# Altium PCB PCB1.PcbDoc
Units mm, origin at the board's own origin, x right, y up, seen from the top; angles counter-clockwise.
Board outline 40 x 40 mm, 2 copper layers (Top Layer, Bottom Layer); 24 components, 22 nets, 121 pads, 12 vias.
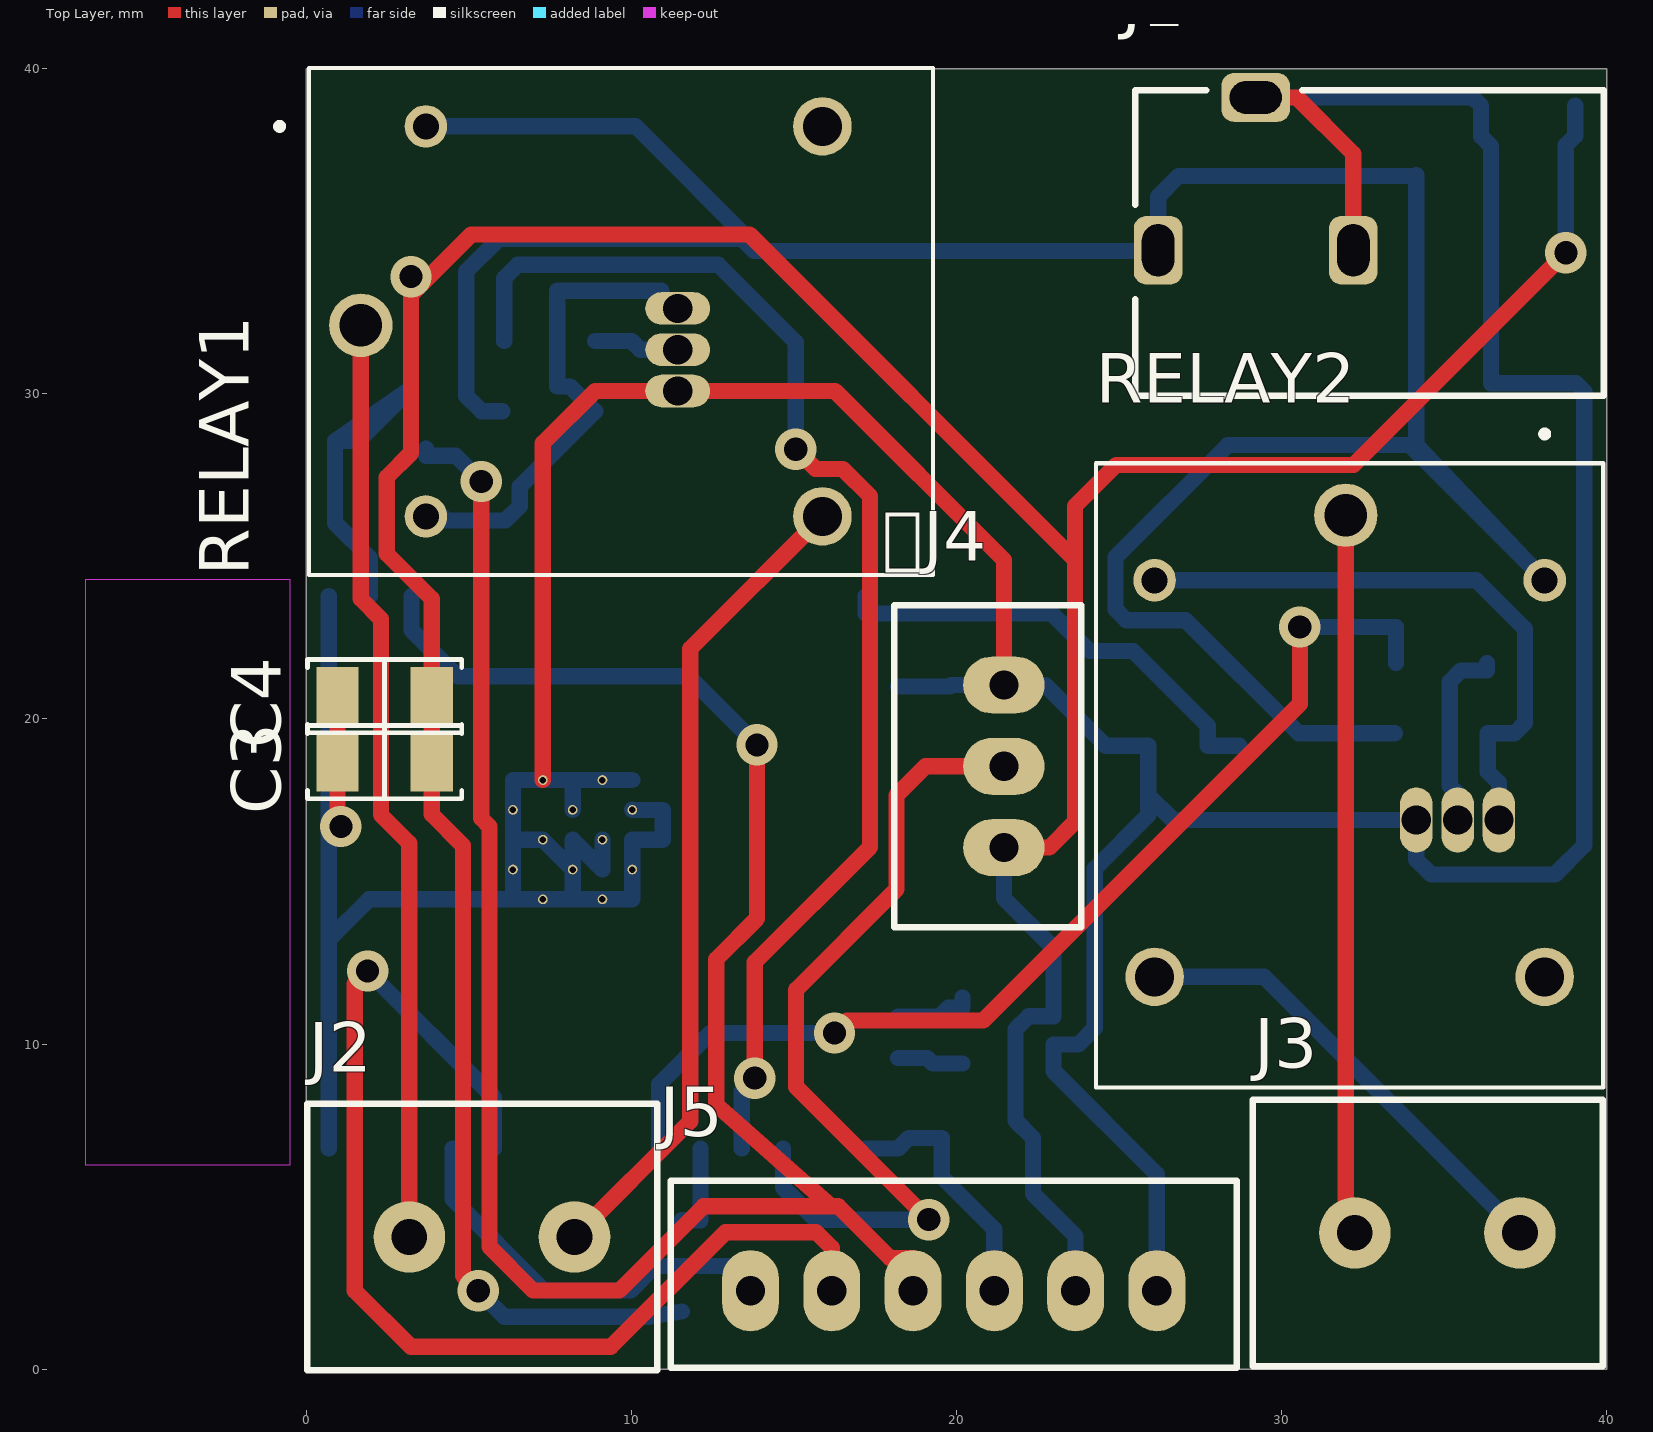
[diagram p0: Top Layer view]
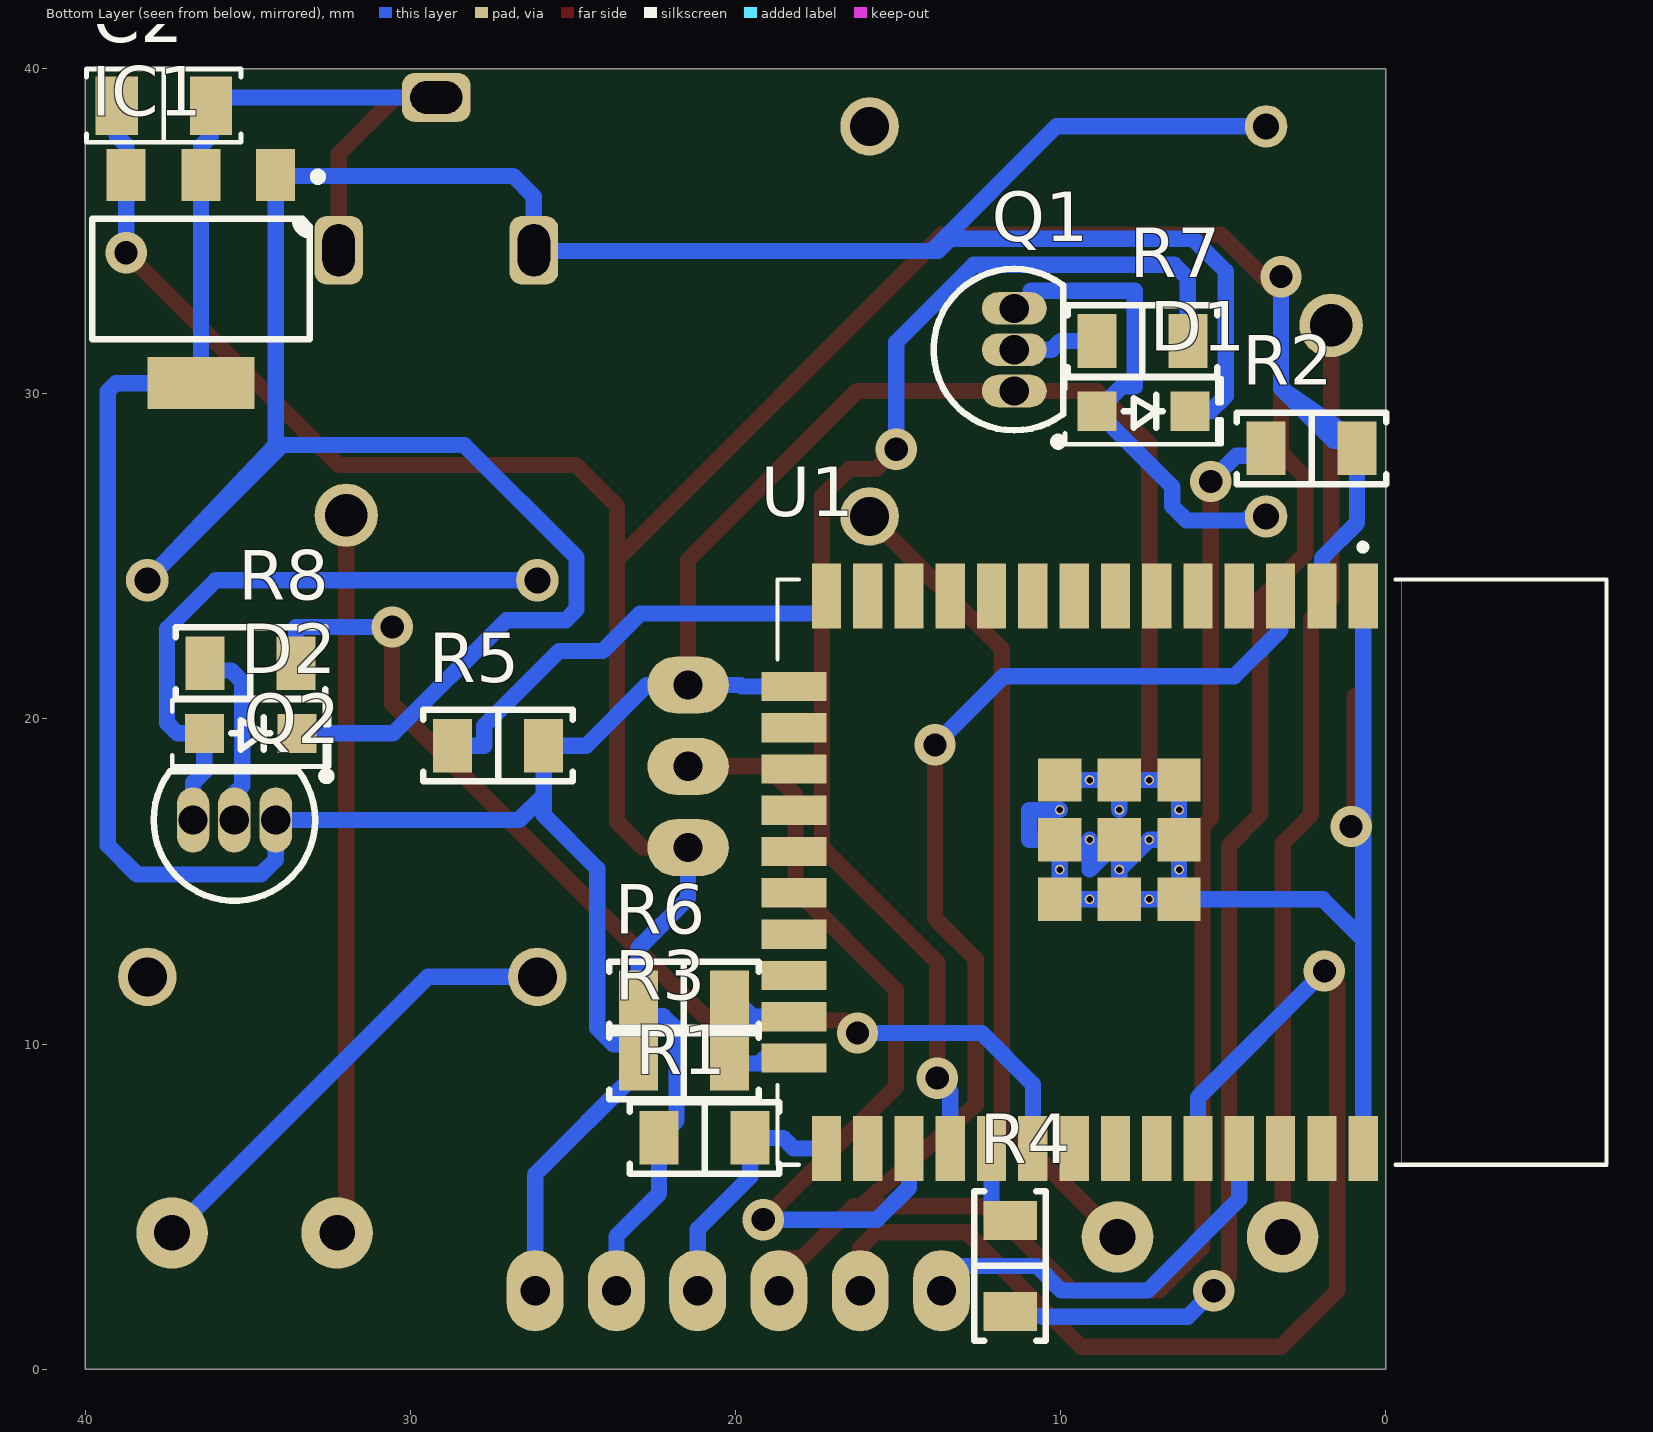
[diagram p1: Bottom Layer view, seen from below]
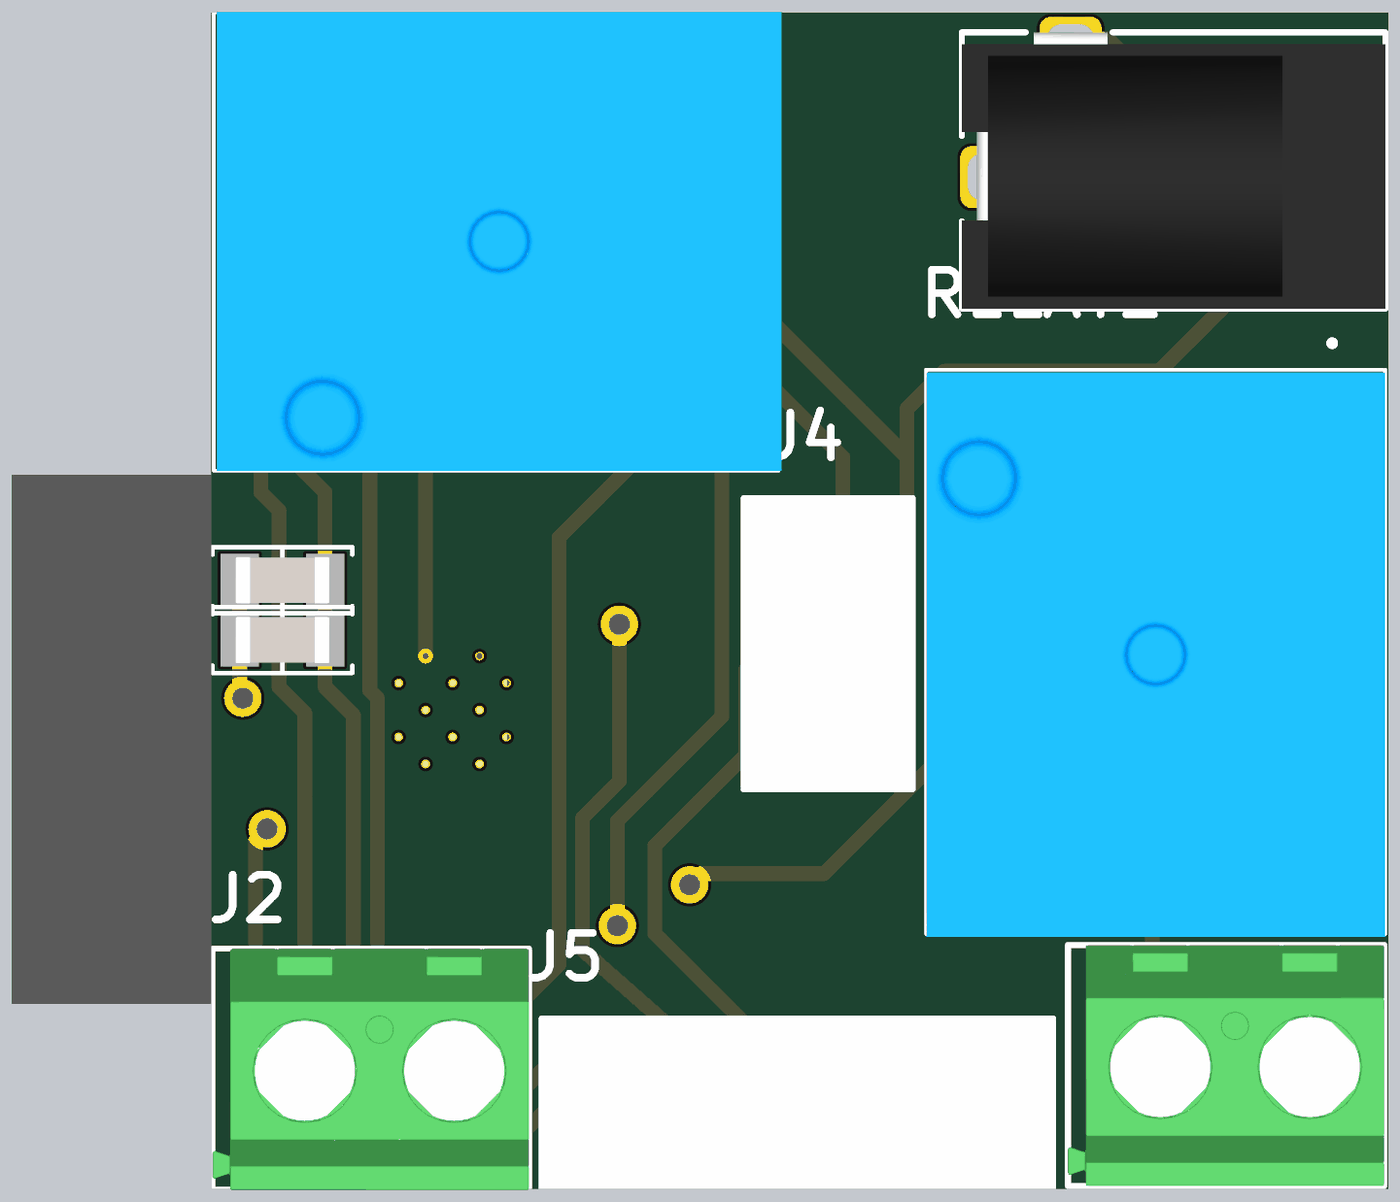
[diagram p2: 3D render of the assembled board from above, using the file's embedded part models]
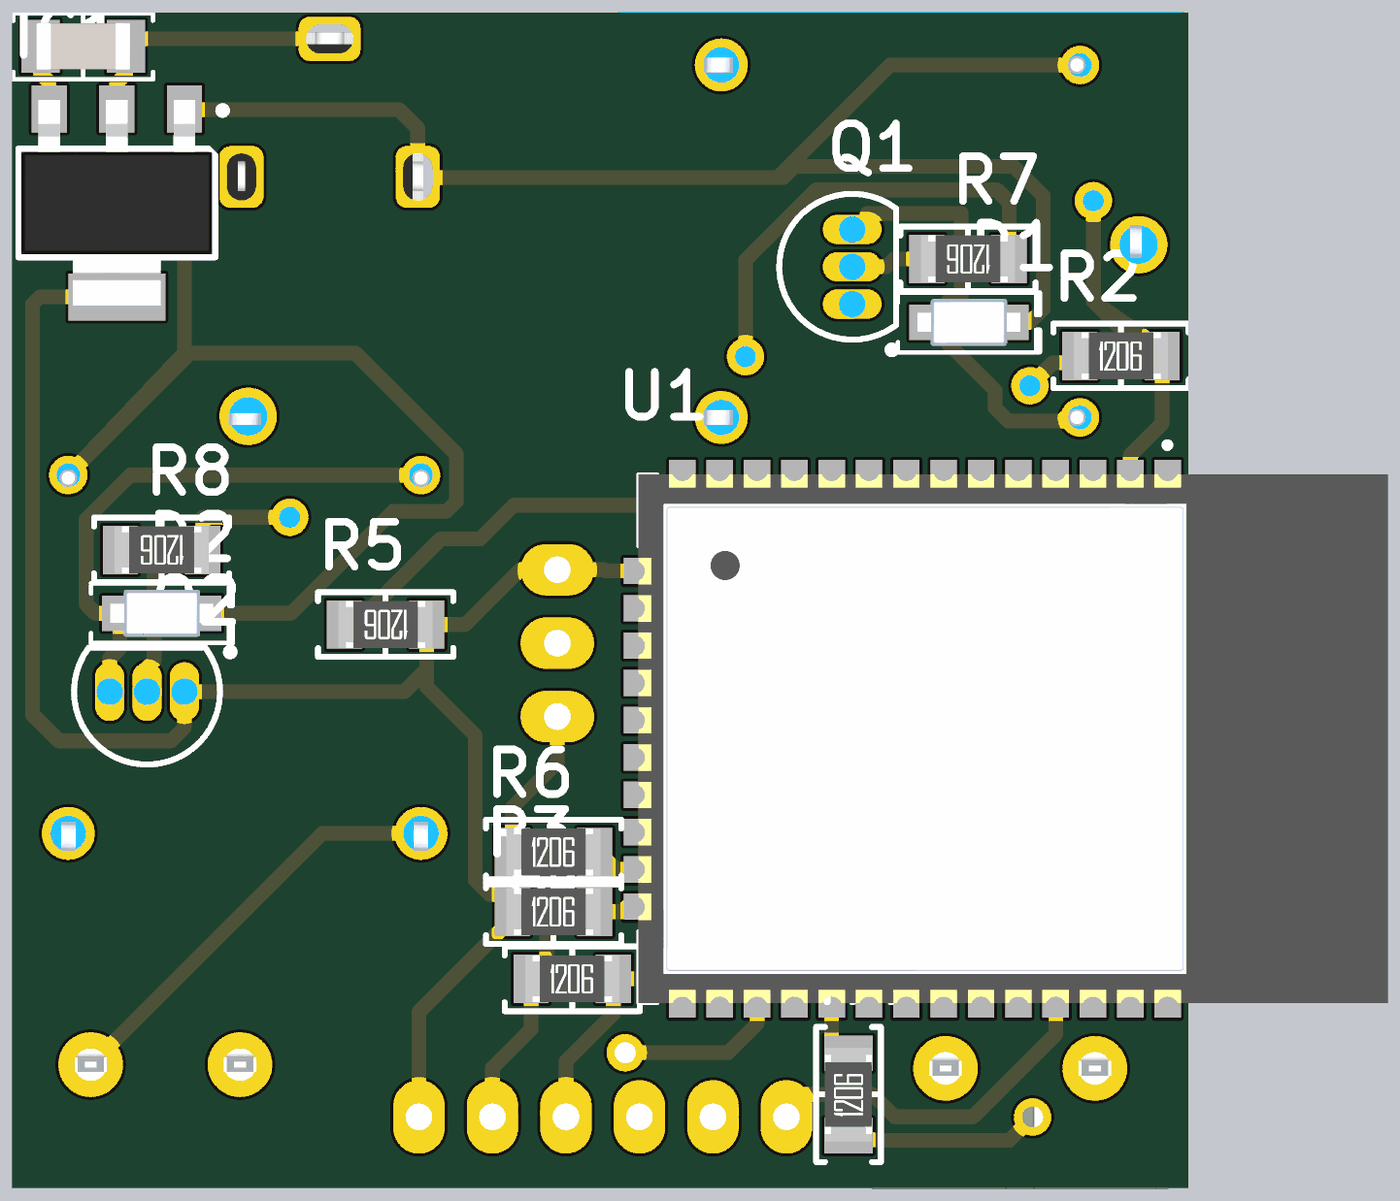
[diagram p3: 3D render of the assembled board from below, using the file's embedded part models]

## Layer stack, top to bottom
Top Solder: solder mask 0.0102, Solder Resist, Dk 3.5
Top Layer: signal copper 0.0356
Dielectric 1: dielectric 0.32, FR-4, Dk 4.8
Bottom Layer: signal copper 0.0356
Bottom Solder: solder mask 0.0102, Solder Resist, Dk 3.5

## Board outline
0,0 40.005,0 40.005,40.005 0,40.005

## Design rules (kind name [scope] priority, off if disabled: settings)
Clearance [All] p1: gap=0.3 ignorepadtopadclearanceinfootprint=TRUE
PolygonConnect [All] p1: connectstyle=Relief reliefconductorwidth=0.254 reliefentries=4 polygonreliefangle="90 Angle" airgapwidth=0.254
RoutingVias [All] p1: holewidth=0.711 width=1.27 viastyle="Through Hole" minholewidth=0.711 minwidth=1.27 maxholewidth=0.711 maxwidth=1.27
SolderMaskExpansion [All] p1: expansion=0.102 istentingtop=FALSE
Width [All] p1: maxlimit=1 minlimit=0.3 preferedwidth=0.5
30 further rules are at their usual default settings.

## Components (designator, comment, footprint, x,y, rotation, side; value= is the part's Value field where it differs from the comment)
J4 "B3B-XH-A(LF)(SN)" "JST XH B3B-XH-A" 21.463,18.542 r270 top
C2 "=VALUE" "CAP 1206_3216 - 0.8MM" 37.592,38.862 r0 bottom
C3 "=VALUE" "CAP 1206_3216 - 0.8MM" 2.413,18.669 r0 top
C4 "=VALUE" "CAP 1206_3216 - 0.8MM" 2.413,20.701 r0 top
D1 "1N4007FLTR" SOD123F 7.46,29.464 r180 bottom
D2 "1N4007FLTR" SOD123F 34.917,19.558 r180 bottom
IC1 "AP2114HA-3.3TRG1" "DIODES SOT-223" 36.449,33.528 r270 bottom
J1 "PJ-102AH" "CUI PJ-102AH" 32.71,34.416 r270 top
J2 "282837-2" "TE 282837-2" 5.715,4.064 r180 top
J3 "282837-2" "TE 282837-2" 34.798,4.191 r180 top
J5 "B6B-XH-A(LF)(SN)" "JST XH B6B-XH-A" 19.919,2.413 r180 top
Q1 "2N3904" TO-92A 11.43,31.357 r180 bottom
Q2 "2N3904" TO-92A 35.421,16.891 r90 bottom
R1 "10 kOhms" "RES 1206_3216" 20.955,7.112 r180 bottom
R2 "10 kOhms" "RES 1206_3216" 2.286,28.321 r180 bottom
R3 "10 kOhms" "RES 1206_3216" 21.59,9.398 r180 bottom
R4 "10 kOhms" "RES 1206_3216" 11.557,3.175 r90 bottom
R5 "10 kOhms" "RES 1206_3216" 27.305,19.177 r0 bottom
R6 "10 kOhms" "RES 1206_3216" 21.59,11.43 r180 bottom
R7 "1 kOhms" "RES 1206_3216" 7.493,31.623 r0 bottom
R8 "1 kOhms" "RES 1206_3216" 34.925,21.717 r0 bottom
RELAY1 "SRD-12VDC-SL-C" RELAY_SRD-12VDC-SL-C 9.783,32.227 r0 top
RELAY2 "SRD-12VDC-SL-C" RELAY_SRD-12VDC-SL-C 32.1,18.165 r270 top
U1 "ESP32-WROOM-32" MODULE_ESP32-WROOM-32 5.958,15.285 r270 bottom

## Footprints (in the part's own frame and the unit in brackets; to place one, negate y for a bottom-side part, rotate by r counter-clockwise, add the part's x,y. Pads: shape width x height; smd on the part's side, far side on the other; paste and mask are expansions set on the pad)
"CAP 1206_3216 - 0.8MM" [mm] "Chip Capacitor, 2-Leads, Body 3.25x1.60mm, IPC Medium Density"
  rect 1.3x1.8 smd: 1(-1.45,0) 2(1.45,0)
  silkscreen extent -2.38,-1.13 2.38,1.13, body extent -1.6,-0.8 1.6,0.8, height 0.8
"CUI PJ-102AH" [mm] "DC Barrel Jack W/ Switch 2.0x5.5"
  rrect50% 2.1x1.5 hole 1 slot 1.6 at 0 deg: 1(0,-6.5) 2(0,-0.5)
  rrect50% 1.5x2.1 hole 1 slot 1.6 at 90 deg: 3(-4.7,-3.5)
  silkscreen extent -4.93,-7.2 4.48,7.2, body extent -4.92,-7.2 4.47,7.2, height 11
"DIODES SOT-223" [mm] "SOT223, 4-Leads, Body 6.50x7.00mm (avg), Pitch 2.30mm, IPC Medium Density"
  rect 1.6x1.2 smd: 1(-3.2,2.3) 2(-3.2,0) 3(-3.2,-2.3)
  rect 1.6x3.3 smd: 4(3.2,0)
  silkscreen extent -3.27,-3.35 1.85,3.72, body extent -3.52,-3.25 3.5,3.25, height 1.8
"JST XH B3B-XH-A" [mm]
  oval 1.75x2.5 hole 0.9: 1(-2.5,0) 2(0,0) 3(2.5,0)
  silkscreen extent -4.95,-3.38 4.95,2.38, body extent -4.95,-3.37 4.95,2.38, height 7
"JST XH B6B-XH-A" [mm]
  oval 1.75x2.5 hole 0.9: 1(-6.25,0) 2(-3.75,0) 3(-1.25,0) 4(1.25,0) 5(3.75,0) 6(6.25,0)
  silkscreen extent -8.7,-3.38 8.7,2.38, body extent -8.7,-3.38 8.7,2.38, height 7
MODULE_ESP32-WROOM-32 [mm]
  rect 2x0.9 smd: 1(-8.5,5.26) 2(-8.5,3.99) 3(-8.5,2.72) 4(-8.5,1.45) 5(-8.5,0.18) 6(-8.5,-1.09) 7(-8.5,-2.36) 8(-8.5,-3.63) 9(-8.5,-4.9) 10(-8.5,-6.17) 11(-8.5,-7.44) 12(-8.5,-8.71) 13(-8.5,-9.98) 14(-8.5,-11.25) 25(8.5,-11.25) 26(8.5,-9.98) 27(8.5,-8.71) 28(8.5,-7.44) 29(8.5,-6.17) 30(8.5,-4.9) 31(8.5,-3.63) 32(8.5,-2.36) 33(8.5,-1.09) 34(8.5,0.18) 35(8.5,1.45) 36(8.5,2.72) 37(8.5,3.99) 38(8.5,5.26)
  rect 0.9x2 smd: 15(-5.715,-12.25) 16(-4.445,-12.25) 17(-3.175,-12.25) 18(-1.905,-12.25) 19(-0.635,-12.25) 20(0.635,-12.25) 21(1.905,-12.25) 22(3.175,-12.25) 23(4.445,-12.25) 24(5.715,-12.25)
  rect 1.33x1.33 smd: 39_1(-2.835,-0.405) 39_2(-1,-0.405) 39_3(0.835,-0.405) 39_4(-2.835,-2.24) 39_5(-1,-2.24) 39_6(0.835,-2.24) 39_7(-2.835,-4.075) 39_8(-1,-4.075) 39_9(0.835,-4.075)
  round 0.3 hole 0.2: 39_10(-1.917,-0.405) 39_11(-0.082,-0.405) 39_12(-2.835,-1.323) 39_13(-1,-1.323) 39_14(0.835,-1.323) 39_15(-1.917,-2.24) 39_16(-0.082,-2.24) 39_17(-2.835,-3.158) 39_18(-1,-3.158) 39_19(0.835,-3.158) 39_20(-1.917,-4.075) 39_21(-0.082,-4.075)
  Keep-Out Layer region: 9,6.45 -9,6.45 -9,12.75 9,12.75
  Keep-Out Layer region: 9,6.45 -9,6.45 -9,12.75 9,12.75
  silkscreen extent -10.1,-12.75 9,12.75, body extent -9,-12.75 9,12.75, height 3.2
RELAY_SRD-12VDC-SL-C [mm]
  round 1.308 hole 0.8: COIL1(-6.1,6) COIL2(-6.1,-6)
  round 1.95 hole 1.3: COM(-8.1,-0.12)
  round 1.8 hole 1.2: NC(6.1,6) NO(6.1,-6)
  silkscreen extent -10.7,-7.8 9.5,7.8, body extent -9.6,-7.8 9.6,7.8, height 15.8
"RES 1206_3216" [mm] "Chip Resistor, 2-Leads, Body 3.13x1.55mm, IPC Medium Density"
  rect 1.2x1.65 smd: 1(-1.4,0) 2(1.4,0)
  silkscreen extent -2.3,-1.1 2.3,1.1, body extent -1.6,-0.8 1.6,0.8, height 0.6
SOD123F [mm] "SODFL, 2-Leads, Body 1.60x3.50mm, IPC Medium Density"
  rect 1.2x1.2 smd: 1(-1.43,0) 2(1.43,0)
  silkscreen extent -2.41,-1.02 2.41,1.02, body extent -1.75,-0.8 1.75,0.8, height 1.1
"TE 282837-2" [mm] "Wire to Board Terminal Block Horizontal with Board, 2 Postions, Body 10.76x8.2 mm, Pitch 5.08mm"
  round 2.2 hole 1.1: 1(-2.54,0) 2(2.54,0)
  silkscreen extent -5.08,-4.1 5.68,4.1, body extent -5.08,-4.1 5.68,4.1, height 10.3
TO-92A [mm] "TO, Flat Index; 3 In-Line, Axial Leads; Body Dia. 4.5mm; Leads 0.51 x 0.48 mm (max)"
  oval 2x1 hole 0.9: 1(0,-1.27) 2(0,0) 3(0,1.27)
  silkscreen extent -2.48,-2.95 1.5,2.48, body extent -2.48,-2.5 1.5,2.5, height 6.86

## Part data
J4: "CONN HEADER VERT 3POS 2.5MM", Current Rating (Amps)=3A, Insulation Color=Natural, Manufacturer="JST Sales America Inc.", Material Flammability Rating="UL94 V-0", Operating Temperature="-25°C ~ 85°C", Supplier Part Number 1=455-2248-ND, Voltage Rating=250V, ComponentLink1Description=Datasheet, ComponentLink1URL=http://www.jst-mfg.com/product/pdf/eng/eXH.pdf, ComponentLink2Description="DigiKey Link", ComponentLink2URL=http://digikey.com/product-detail/en/jst-sales-america-inc/B3B-XH-A-LF-SN/455-2248-ND/1651046, Connector Type=Header, Contact Finish - Mating=Tin, Contact Finish - Post=Tin, Contact Length - Post="0.134\" (3.40mm)", Contact Material=Brass, Contact Shape=Square, Contact Type="Male Pin", Fastening Type="Detent Lock", Insulation Height="0.276\" (7.00mm)", Insulation Material="Polyamide (PA66), Nylon 6/6", LastUpdated="1/12/2020 11:46:22 PM", Lifecycle Status=Active, Minimum Order=1, Mounting Type="Through Hole", Number of Positions=3, Number of Positions Loaded=All, Number of Rows=1, Packaging=Bulk, Part Number=B3B-XH-A(LF)(SN), Part Status=Active, PartId=68, Pitch - Mating="0.098\" (2.50mm)", Price=0.19, Series=XH, Shrouding="Shrouded - 4 Wall", Style="Board to Cable/Wire", Supplier 1=DigiKey, Termination="Press-Fit, Solder"
C2 C3: library part EMK316BJ106MD-T, "CAP CER 10UF 16V X5R 1206", Capacitance="10 µF", Part Number=EMK316BJ106MD-T
C4: library part CC1206MRY5V9BB104, "CAP CER 0.1UF 50V Y5V 1206", Capacitance="0.1 µF", Part Number=CC1206MRY5V9BB104
D1 D2: "STANDARD RECTIFIER 1000V SOD-123", Capacitance @ Vr, F="15pF @ 4V, 1MHz", Current - Average Rectified (Io)=1A, Current - Reverse Leakage @ Vr="5µA @ 1000V", Manufacturer="SMC Diode Solutions", Package / Case=SOD-123F, Supplier Device Package=SOD-123FL, Supplier Part Number 1=1655-1N4007FLCT-ND, Voltage - DC Reverse (Vr) (Max)=1000V, Voltage - Forward (Vf) (Max) @ If="1.1V @ 1A", ComponentLink1Description=Datasheet, ComponentLink1URL=http://www.smc-diodes.com/propdf/1N4001FL-1N4007FL%20N1646%20REV.A.pdf, ComponentLink2Description="DigiKey Link", ComponentLink2URL=http://digikey.com/product-detail/en/smc-diode-solutions/1N4007FLTR/1655-1N4007FLCT-ND/11657827, Diode Type=Standard, LastUpdated="8/30/2020 8:59:55 PM", Lifecycle Status=Active, Minimum Order=1, Mounting Type="Surface Mount", Packaging=TapeAndReel, Part Number=1N4007FLTR, PartId=3314, Price=0.01, Speed="Standard Recovery >500ns, > 200mA (Io)", Supplier 1=DigiKey
IC1: "IC REG LINEAR 3.3V 1A SOT-223-3", Current - Output=1A, Current - Quiescent (Iq)="90 µA", Manufacturer="Diodes Incorporated", Operating Temperature="-40°C ~ 85°C", Package / Case="TO-261-4, TO-261AA", Supplier Device Package=SOT-223-3, Supplier Part Number 1=AP2114HA-3.3TRG1DICT-ND, Voltage - Input (Max)=6V, Voltage - Output (Min/Fixed)=3.3V, Voltage Dropout (Max)="0.75V @ 1A", ComponentLink1Description=Datasheet, ComponentLink1URL=https://www.diodes.com/assets/Datasheets/AP2114.pdf, ComponentLink2Description="DigiKey Link", ComponentLink2URL=https://www.digikey.com/en/products/detail/diodes-incorporated/AP2114HA-3-3TRG1/4770627, LastUpdated="4/5/2026 9:04:43 PM", Lifecycle Status=Active, Minimum Order=1, Mounting Type="Surface Mount", Number of Regulators=1, Output Configuration=Positive, Output Type=Fixed, Packaging=TapeAndReel, Part Number=AP2114HA-3.3TRG1, Part Status=Active, Price=0.08, Protection Features="Over Current, Over Temperature", PSRR="65dB (100Hz ~ 1kHz)", Series=-, Supplier 1=DigiKey
J1: "CONN PWR JACK 2X5.5MM SOLDER", Current Rating (Amps)=5A, Manufacturer="CUI Devices", Material Flammability Rating="UL94 V-0", Supplier Part Number 1=CP-102AH-ND, Voltage - Rated=24VDC, Actual Diameter="0.079\" (2.00mm ID), 0.256\" (6.50mm OD)", ComponentLink1Description=Datasheet, ComponentLink1URL=https://www.cuidevices.com/product/resource/digikeypdf/pj-102ah.pdf, ComponentLink2Description="DigiKey Link", ComponentLink2URL=//digikey.com/product-detail/en/cui-devices/PJ-102AH/CP-102AH-ND/408448, Connector Type=Jack, Gender=Male, Industry Recognized Mating Diameter="2.00mm ID (0.079\"), 5.50mm OD (0.217\")", Internal Switch(s)="Single Switch, Normally Closed", LastUpdated="12/16/2019 7:01:27 PM", Lifecycle Status=0, Mating Length/Depth="0.354\" (9.00mm)", Minimum Order=1, Mounting Type="Through Hole, Right Angle", Number of Positions/Contacts="2 Conductors, 3 Contacts", Packaging=Tray, Part Number=PJ-102AH, Part Status=Active, Price=0.76, Series=-, Shielding=Unshielded, Supplier 1=DigiKey, Termination=Solder
J2 J3: "TERM BLK 2P SIDE ENT 5.08MM PCB", Color=Green, Current="13.5 A", Manufacturer="TE Connectivity AMP Connectors", Supplier Part Number 1=A113320-ND, Voltage="300 V", ComponentLink1Description=Datasheet, ComponentLink1URL=https://www.te.com/commerce/DocumentDelivery/DDEController?Action=srchrtrv&DocNm=282837&DocType=Customer+Drawing&DocLang=English, ComponentLink2Description="DigiKey Link", ComponentLink2URL=https://www.digikey.com/en/products/detail/te-connectivity-amp-connectors/282837-2/2187973, Features="Interlocking (Side)", LastUpdated="6/21/2022 3:00:23 PM", Lifecycle Status=Active, Mating Orientation="Horizontal with Board", Minimum Order=1, Mounting Type="Through Hole", Number of Levels=1, Packaging=Tray, Part Number=282837-2, Part Status=Active, Pitch="0.200\" (5.08mm)", Positions Per Level=2, Price=0.31, Series=Buchanan, Supplier 1=DigiKey, Wire Gauge="16-28 AWG", Wire Termination="Screw - Rising Cage Clamp"
J5: "CONN HEADER VERT 6POS 2.5MM", Part Number=B6B-XH-A(LF)(SN)
Q1 Q2: "NPN General Purpose Amplifier", ComponentLink1Description="Manufacturer Link", ComponentLink1URL=http://www.fairchildsemi.com/, ComponentLink2Description=Datasheet, ComponentLink2URL=http://www.fairchildsemi.com/ds/2N%2F2N3904.pdf, DatasheetVersion=1997, LatestRevisionDate=15-Jan-2003, LatestRevisionNote="PCB Footprint 'BCY-W3/D4.7' replaced", PackageDescription="TO, Flat Index; 3 In-Line, Axial Leads; Body Dia. 4.5mm; Leads 0.51 x 0.48 mm (max)", PackageReference=TO-92A, PackageVersion=Sep-1998, Published=8-Jun-2000, Publisher="Altium Limited"
R1 R2 R3 R4 R5 R6 R7 R8: library part CRG1206F10K, "RES SMD 10K OHM 1% 1/4W 1206", Device Package="1206 (3216 Metric)", Manufacturer="TE Connectivity Passive Product", Operating Temperature="-55°C ~ 155°C", Power (Watts)="0.25W, 1/4W", Supplier Device Package=1206, Supplier Part Number 1=A106069CT-ND, Temperature Coefficient=±100ppm/°C, Tolerance=±1%, ComponentLink1Description=Datasheet, ComponentLink1URL=https://www.te.com/commerce/DocumentDelivery/DDEController?Action=srchrtrv&DocNm=1773204&DocType=DS&DocLang=English, ComponentLink2Description="DigiKey Link", ComponentLink2URL=https://www.digikey.com/en/products/detail/te-connectivity-passive-product/CRG1206F10K/2389909, Composition="Thick Film", Height - Seated (Max)="0.026\" (0.65mm)", LastUpdated="4/6/2026 8:00:52 PM", Lifecycle Status=Active, Minimum Order=1, Number of Terminations=2, Package / Case="1206 (3216 Metric)", Packaging=TapeAndReel, Part Number=CRG1206F10K, Part Status=Active, PartId=26989, Price=0.01, Series="CRG, Neohm", Size / Dimension="0.122\" L x 0.061\" W (3.10mm x 1.55mm)", Supplier 1=DigiKey
  R1 R2 R3 R4 R5 R6: Resistance="10 kOhms"
  R7 R8: Resistance="1 kOhms"
RELAY1 RELAY2: "General Purpose Non Latching 12VDC SPDT Through Hole Relays RoHS", Package="NON STANDARD-5 Songle Relay", Check_prices=https://www.snapeda.com/parts/SRD-12VDC-SL-C/Songle+Relay/view-part/?ref=eda, MF="Songle Relay", MP=SRD-12VDC-SL-C, SnapEDA_Link=https://www.snapeda.com/parts/SRD-12VDC-SL-C/Songle+Relay/view-part/?ref=snap
U1: "Bluetooth, WiFi 802.11b/g/n, Bluetooth v4.2 +EDR, Class 1, 2 and 3 Transceiver Module 2.4GHz ~ 2.5GHz Antenna Not Included, U.FL Surface Mount", Package="Module Espressif Systems", Availability="In Stock", Check_prices=https://www.snapeda.com/parts/ESP32-WROOM-32/Espressif+Systems/view-part/?ref=eda, MF="Espressif Systems", MP=ESP32-WROOM-32, Price=None, Purchase-URL=https://pricing.snapeda.com/search/part/ESP32-WROOM-32/?ref=eda, SnapEDA_Link=https://www.snapeda.com/parts/ESP32-WROOM-32/Espressif+Systems/view-part/?ref=snap

## Via types
v1: diameter 1.27, hole 0.711, Top Layer to Bottom Layer, 12 vias

## Nets (pads, with @x,y where several pads share a name; then routed paths per layer and width w, separated by ;. In a path a pad name is that pad's centre, name@x,y a point inside that pad or via, vN(x,y) a via of type N, cw(c..) or ccw(c..) an arc to the next point about the centre after c; other vN are vias at no path point)
+9: D1.2 D2.2 IC1.1 J1.1 RELAY1.COIL1 RELAY2.COIL1 | length 90.9
  Bottom Layer w0.5: RELAY1.COIL1 10.135,38.227 13.97,34.392 ; D1.2 5.397,29.464 4.928,29.934 4.928,33.769 5.931,34.772 13.399,34.772 13.78,34.392 13.97,34.392 ; D2.2 30.531,19.558 27.051,23.038 25.226,23.038 24.896,23.368 24.896,24.972 28.346,28.423 33.942,28.423 RELAY2.COIL1 34.149,28.423 IC1.1@34.149,36.703 ; IC1.1 IC1.1@34.149,36.703 ; 13.97,34.392 26.21,34.392 J1.1 26.21,36.068 26.845,36.703 IC1.1@34.149,36.703
GND: J4.1 C2.1 C3.1 C4.1 IC1.2 IC1.4 J1.2 J1.3 J5.1 Q1.1 Q2.1 R3.1 R5.1 U1.1 U1.15 U1.38 U1.39_1 U1.39_2 U1.39_3 U1.39_4 U1.39_5 U1.39_6 U1.39_7 U1.39_8 U1.39_9 U1.39_10 U1.39_11 U1.39_12 U1.39_13 U1.39_14 U1.39_15 U1.39_16 U1.39_17 U1.39_18 U1.39_19 U1.39_20 U1.39_21 | length 164.8
  Top Layer w0.5: C4.1 C3.1 0.963,16.792 v1(1.067,16.688) ; U1.39_12 7.281,28.477 8.89,30.087 Q1.1 16.268,30.087 21.463,24.892 J4.1 ; J1.3 30.48,39.116 32.21,37.386 J1.2
  Bottom Layer w0.5: U1.38 0.698,11.439 0.698,13.215 ; U1.1 v1@0.698,17.057 ; v1(1.067,16.688) v1@0.698,17.057 ; U1.39_15 U1.39_4 ; U1.39_18 9.116,15.367 U1.39_5 U1.39_16 ; U1.39_20 10.039,17.202 10.973,17.196 10.973,16.284 U1.39_8 U1.39_21 U1.39_9 9.598,14.45 U1.39_19 U1.39_6 ; U1.39_7 9.585,18.119 U1.39_17 U1.39_4 ; U1.15 19.812,21 19.855,21.042 J4.1 22.733,21.042 24.598,19.177 R5.1 25.905,17.653 ; J5.1 26.169,5.99 22.99,9.169 R3.1 22.99,9.982 23.749,9.982 24.257,10.49 24.257,15.395 25.905,17.043 25.905,17.653 ; J1.3 35.888,39.116 C2.1 36.142,37.924 36.449,37.617 IC1.4 36.713,30.328 39.065,30.328 39.319,30.074 39.319,16.116 38.417,15.215 34.608,15.215 34.151,15.671 Q2.1 26.667,16.891 25.905,17.653 ; 0.698,13.215 v1@0.698,17.057 ; 0.698,13.215 1.936,14.45 U1.39_3 ; U1.39_3 U1.39_11 U1.39_2 ; U1.39_3 U1.39_14 U1.39_6 ; U1.39_2 U1.39_10 U1.39_1 U1.39_12 U1.39_4 ; U1.39_2 U1.39_13 U1.39_16 ; U1.39_6 U1.39_16
GPIO0: J5.3 R1.2 U1.25 | length 7.9
  Bottom Layer w0.5: U1.25 18.212,6.784 18.539,7.112 R1.2 19.555,5.913 21.169,4.299 J5.3
GPIO2: R3.2 U1.24 | length 2.1
  Bottom Layer w0.5: U1.24 19.101,9.57 19.272,9.398 R3.2
GPIO5: R4.2 U1.29 | length 2.8
  Bottom Layer w0.5: R4.2 12.128,4.575 U1.29
GPIO12: R5.2 U1.14 | length 14.1
  Bottom Layer w0.5: U1.14 17.208,23.241 22.941,23.241 24.096,22.086 25.438,22.086 27.737,19.787 27.737,19.177 R5.2
GPIO15: R6.2 U1.23 | length 2.4
  Bottom Layer w0.5: U1.23 19.482,10.84 19.761,11.119 20.19,11.119 R6.2
NetD1_1: D1.1 Q1.3 RELAY1.COIL2 | length 15.8
  Bottom Layer w0.5: RELAY1.COIL2 4.197,26.227 4.197,26.105 6.129,26.105 6.567,26.543 6.567,27.141 D1.1 8.128,30.226 7.722,30.226 7.722,33.172 10.922,33.172 10.922,32.627 Q1.3
NetD2_1: D2.1 Q2.3 RELAY2.COIL2 | length 19
  Bottom Layer w0.5: RELAY2.COIL2 35.996,24.265 37.49,22.771 37.49,19.875 37.173,19.558 D2.1 36.347,18.378 36.691,18.034 Q2.3
NetQ1_2: Q1.2 R7.2 | length 2.6
  Bottom Layer w0.5: R7.2 10.008,31.623 10.274,31.357 Q1.2
NetQ2_2: Q2.2 R8.2 | length 5.9
  Bottom Layer w0.5: Q2.2 35.421,17.704 35.179,17.946 35.179,21.145 35.522,21.488 36.325,21.488 R8.2
RELAY1_COM: J2.2 RELAY1.COM | length 28.7
  Top Layer w0.5: RELAY1.COM 1.683,28.235 1.679,28.231 1.679,23.696 2.3,23.075 2.3,17.053 3.175,16.178 J2.2
RELAY1_NO: J2.1 RELAY1.NO | length 25.3
  Top Layer w0.5: J2.1 11.816,7.625 11.816,22.16 RELAY1.NO
RELAY1_OUT: R7.1 U1.28 | length 39.9
  Top Layer w0.5: v1(13.801,8.95) 13.801,12.512 17.348,16.059 17.348,26.848 16.51,27.686 15.672,27.686 v1(15.062,28.296)
  Bottom Layer w0.5: R7.1 6.093,33.553 6.512,33.972 12.675,33.972 15.062,31.585 v1(15.062,28.296) ; U1.28 13.398,8.547 v1(13.801,8.95)
RELAY2_COM: J3.2 RELAY2.COM | length 22.2
  Top Layer w0.5: RELAY2.COM 31.98,4.469 J3.2
RELAY2_NO: J3.1 RELAY2.NO | length 14.5
  Bottom Layer w0.5: RELAY2.NO 29.464,12.065 J3.1
RELAY2_OUT: R8.1 U1.30 | length 33
  Top Layer w0.5: v1(16.256,10.338) 16.641,10.723 20.832,10.723 30.571,20.462 30.571,22.823 v1(30.565,22.828)
  Bottom Layer w0.5: U1.30 10.858,8.763 12.433,10.338 v1(16.256,10.338) ; v1(30.565,22.828) 33.525,22.828 R8.1
RESET: J5.4 R2.1 U1.3 | length 71.7
  Top Layer w0.5: v1(5.385,27.305) 5.385,16.942 5.639,16.688 5.639,3.76 6.985,2.414 9.628,2.414 12.227,5.013 16.151,5.013 ; v1(13.868,19.202) 13.868,13.862 12.616,12.61 12.616,8.128 16.151,5.013 ; J5.4 18.669,3.413 17.968,3.413 16.368,5.013 16.151,5.013
  Bottom Layer w0.5: U1.3 3.238,22.733 4.66,21.311 11.76,21.311 v1(13.868,19.202) ; R2.1 3.686,28.092 4.597,28.092 v1(5.385,27.305)
RX: J5.5 U1.34 | length 35.4
  Top Layer w0.5: v1(1.892,12.243) 1.499,11.85 1.499,2.413 3.226,0.686 9.373,0.686 12.9,4.213 15.686,4.213 16.169,3.73 J5.5
  Bottom Layer w0.5: v1(1.892,12.243) 5.778,8.357 U1.34
TEMP_SENSOR_IN: J4.2 U1.27 | length 25.8
  Top Layer w0.5: v1(19.152,4.597) 15.071,8.678 15.071,11.667 18.161,14.757 18.161,17.653 19.05,18.542 J4.2
  Bottom Layer w0.5: U1.27 14.668,5.588 15.659,4.597 v1(19.152,4.597)
TX: J5.6 U1.35 | length 13
  Bottom Layer w0.5: U1.35 4.508,5.232 7.326,2.414 9.982,2.414 10.743,3.175 13.669,3.175 J5.6
VCC: J4.3 C2.2 C3.2 C4.2 IC1.3 J5.2 R1.1 R2.2 R4.1 R6.1 U1.2 | length 130.3
  Top Layer w0.5: v1(3.226,33.604) v1@3.226,33.045 ; v1(5.295,2.41) 4.826,2.879 4.826,16.104 3.863,17.067 C3.2 C4.2 3.863,23.696 2.479,25.08 2.479,27.432 3.226,28.179 v1@3.226,33.045 ; J4.3 22.86,16.042 23.647,16.829 23.647,24.892 ; v1(38.749,34.341) 32.221,27.813 24.917,27.813 23.647,26.543 23.647,24.892 ; v1@3.226,33.045 5.08,34.9 13.64,34.9 23.647,24.892
  Bottom Layer w0.5: U1.2 1.968,24.943 0.886,26.025 R2.2 R2.2@0.886,28.55 ; v1(3.226,33.604) 3.226,33.045 3.226,30.175 ; v1(5.295,2.41) 6.091,1.614 10.544,1.614 R4.1 ; J4.3 21.463,14.481 22.99,12.954 R6.1 22.99,10.855 22.225,10.855 21.819,10.449 21.819,7.648 R1.1 22.355,5.403 23.669,4.089 J5.2 ; v1(38.749,34.341) IC1.3 38.749,37.643 39.042,37.936 C2.2 ; R2.2@0.886,28.55 1.6,28.55 3.226,30.175 ; R2.2@0.886,28.55 3.226,30.175
pads on no net: RELAY1.NC RELAY2.NC U1.4 U1.5 U1.6 U1.7 U1.8 U1.9 U1.10 U1.11 U1.12 U1.13 U1.16 U1.17 U1.18 U1.19 U1.20 U1.21 U1.22 U1.26 U1.31 U1.32 U1.33 U1.36 U1.37

## Text inside footprints (layer, text, board x,y; h text height)
U1: Mechanical 13 "ANTENNA" at -3.042,21.285 h1.78 r90